# EAGLE board Kick_mess_01 (EAGLE 9.6.2)

Size 270 x 55 mm. Coordinates in mm from the lower left corner, seen from the top.
Outline: 270,0 270,45 220,55 0,4 0,0 270,0
Copper layers (1*16): Top 0.035mm / dielectric 1.5mm / Bottom 0.035mm
Design rules "default": minimum track width 6mil, minimum drill 0.35mm, track to track 6mil, track to pad 6mil, pad to pad 6mil, via to via 6mil, smd to smd 6mil, copper to edge 40mil, drill to drill 6mil, minimum pad ring 10mil, minimum via ring 8mil, stop-mask expansion 4mil, vias tented up to drill 0mil, thermal gap 10mil

## Footprints (pad centres in the part's own frame; a part is rotated, then mirrored left to right if it is on the bottom)
4,1 = hole 4.1: 0,0

## Placement (x,y rotation side)
H1  MOUNT-HOLE4.1  [4,1]  263,7 90 top
H2  MOUNT-HOLE4.1  [4,1]  263,39 90 top
H3  MOUNT-HOLE4.1  [4,1]  220,48 90 top
H4  MOUNT-HOLE4.1  [4,1]  45,7 90 top
H5  MOUNT-HOLE4.1  [4,1]  130,27 90 top
H6  MOUNT-HOLE4.1  [4,1]  155,7 90 top

## Library data of the parts
H1-H6 = holes

## Text on the board
Top: 1 m/s | 1 m/s / E = 1/2 * m * v * v | 1 m/s / E = 1/2 * m * v * v
tNames: open source !!! / (Thanks to BohleBots) | Robocup Junior | 1 m/s / E = 0.5 * m * v * v = m*g*h / -> h=0.5 /g = 51mm / start ramp at 4mm, so to point is 55mm / Use 20mm spacers | golf ball kicker measurement device
bNames: Robocup Junior